# EAGLE board avr_lag2 (EAGLE 5.07)
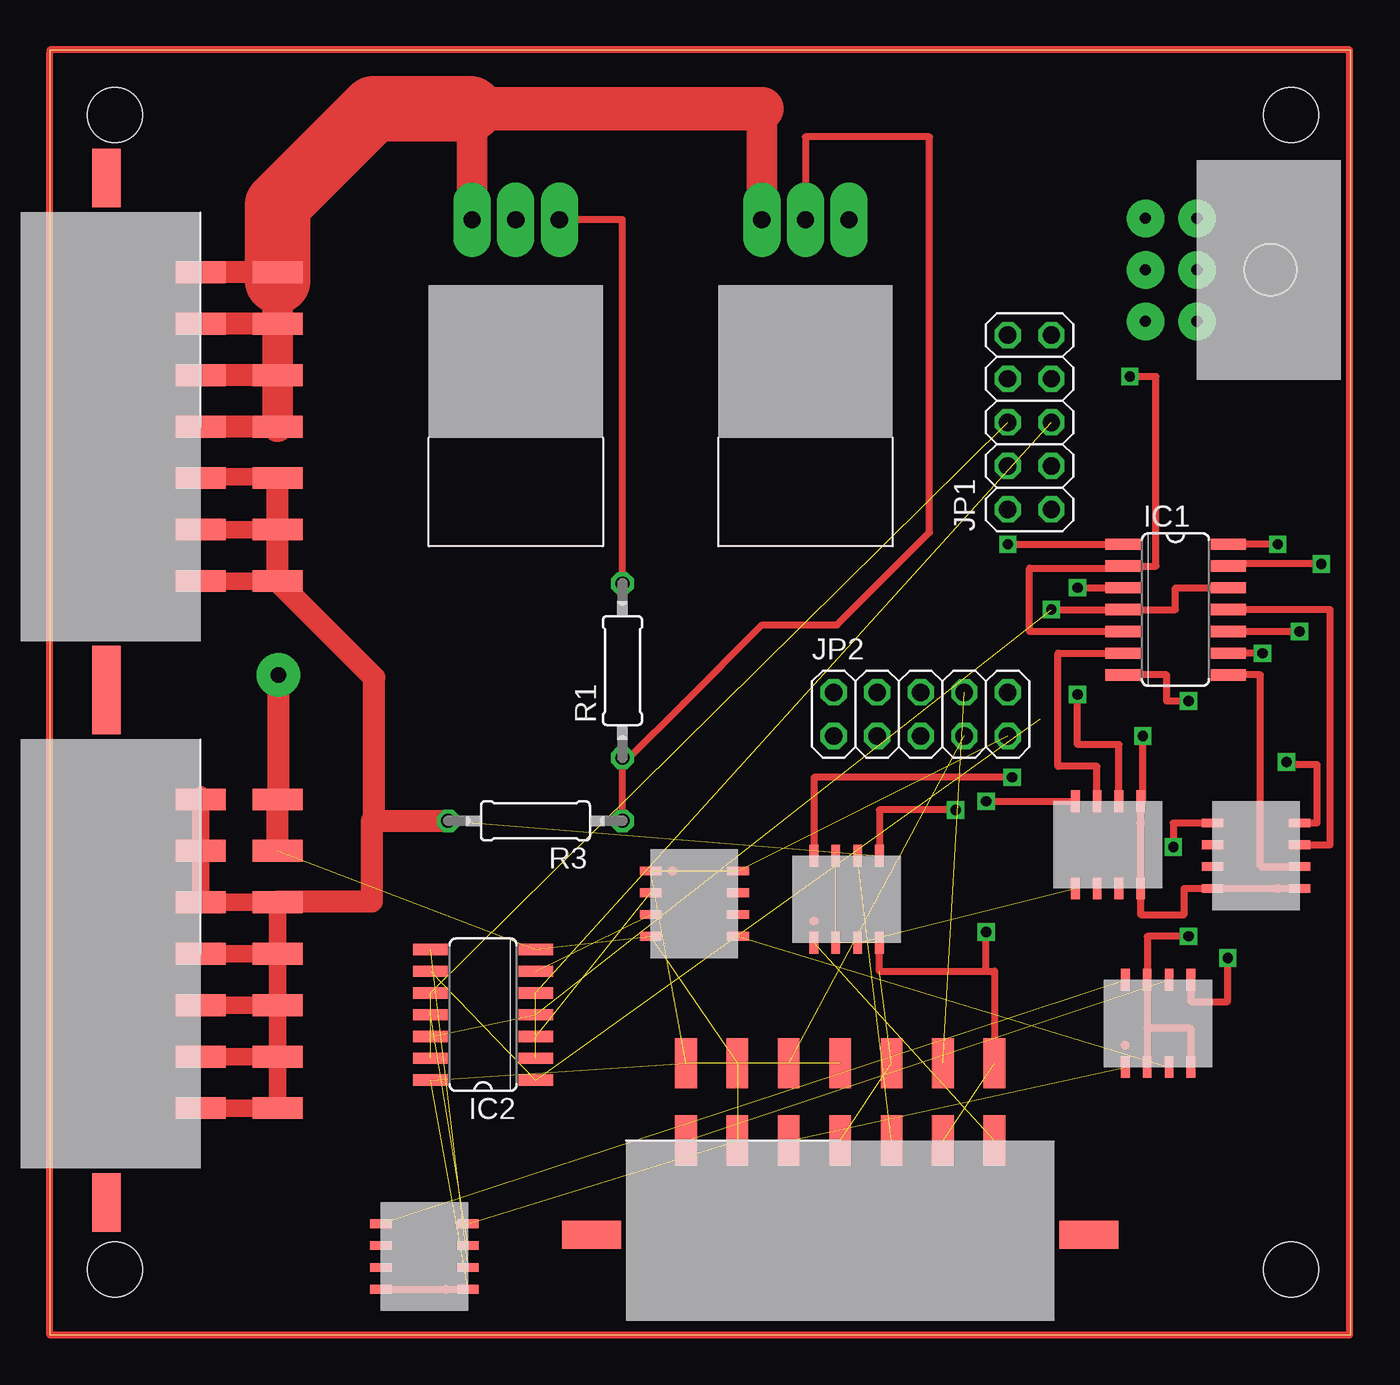
[diagram p0: board, top side]
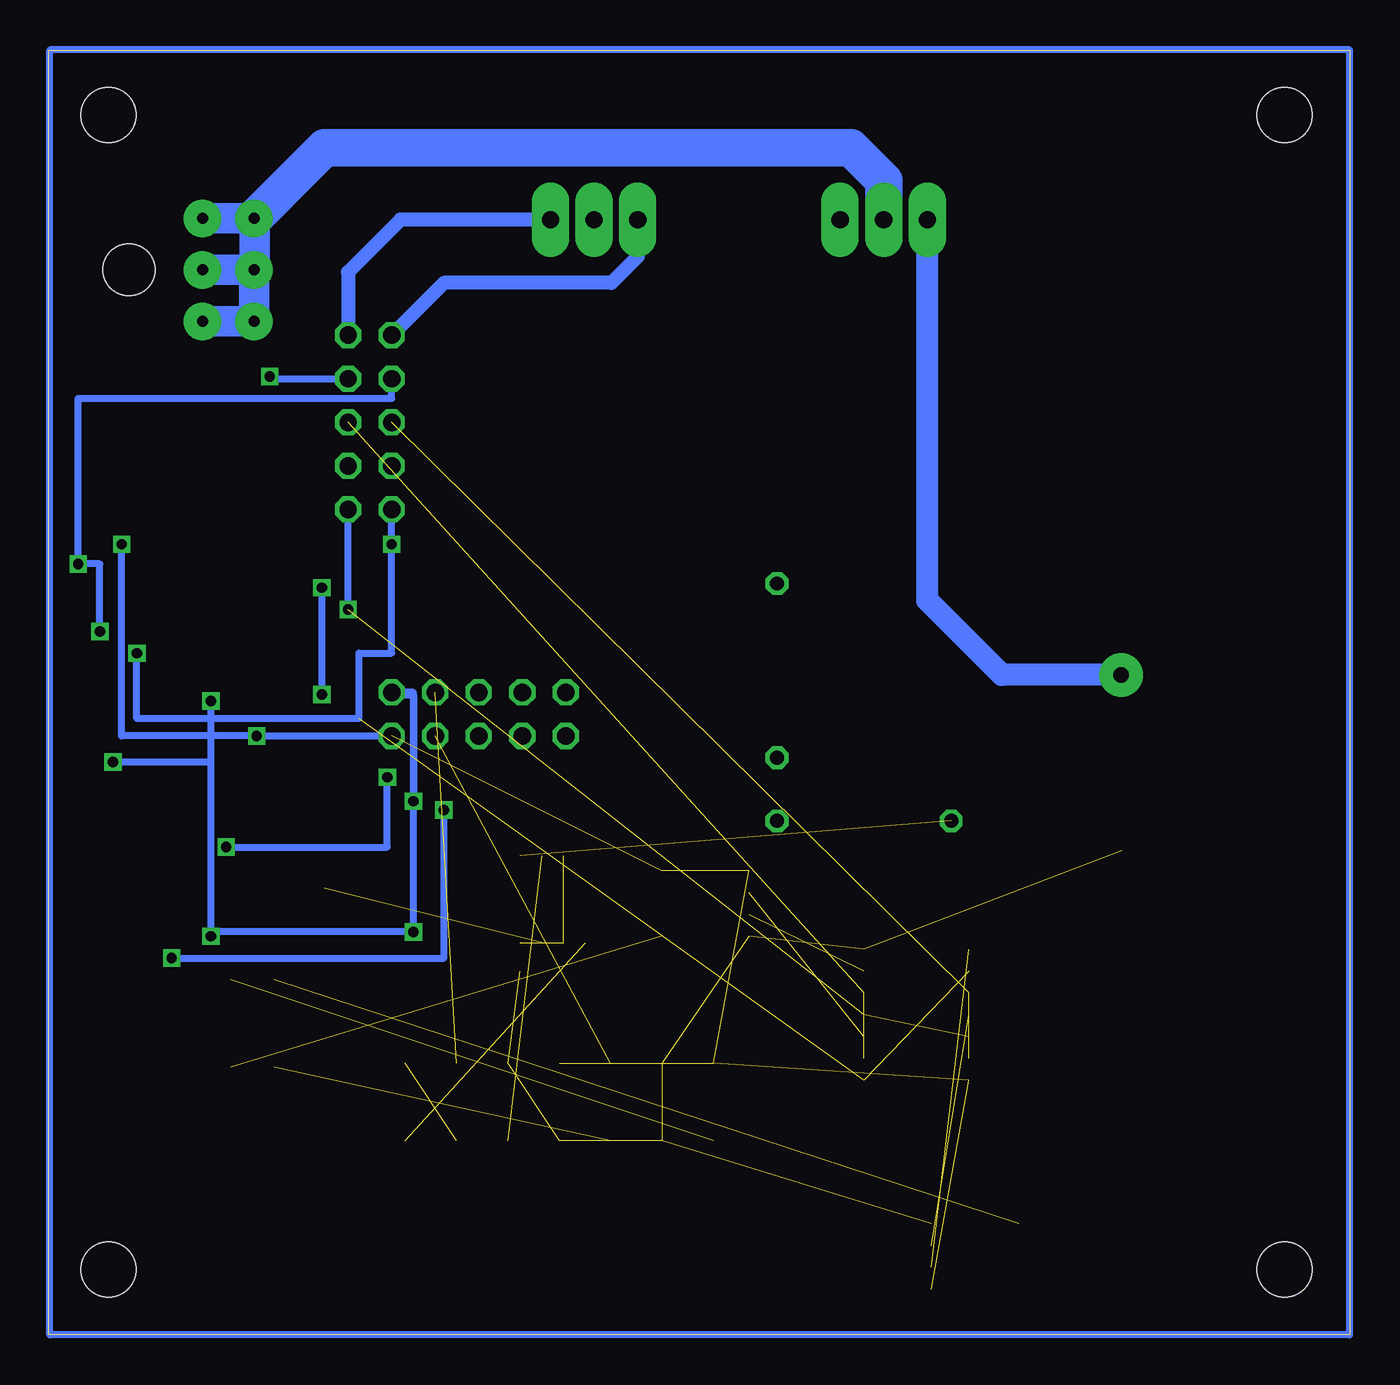
[diagram p1: board, bottom side, seen from below]

Size 75.87 x 74.92 mm. Coordinates in mm from the lower left corner, seen from the top.
Outline: 0,0 75.87,0 75.87,74.92 0,74.92 0,0
Copper layers (1*16): Top 0.035mm / dielectric 1.5mm / Bottom 0.035mm
Design rules "default": minimum track width 10mil, minimum drill 24mil, track to track 8mil, track to pad 8mil, pad to pad 8mil, via to via 8mil, smd to smd 8mil, copper to edge 40mil, drill to drill 8mil, minimum pad ring 10mil, minimum via ring 8mil, stop-mask expansion 4mil, vias tented up to drill 0mil, thermal gap 10mil
Holes 3.2 mm at 3.81,3.81 3.81,71.12 72.39,71.12 72.39,3.81

## Footprints (pad centres in the part's own frame; a part is rotated, then mirrored left to right if it is on the bottom)
SO14 = smd 0.66 x 2.032: 1 -3.81,-3.073; 2 -2.54,-3.073; 3 -1.27,-3.073; 4 0,-3.073; 5 1.27,-3.073; 6 2.54,-3.073; 7 3.81,-3.073; 8 3.81,3.073; 9 2.54,3.073; 10 1.27,3.073; 11 0,3.073; 12 -1.27,3.073; 13 -2.54,3.073; 14 -3.81,3.073
2X05 = drill 1.016 octagon: 1 -5.08,-1.27; 2 -5.08,1.27; 3 -2.54,-1.27; 4 -2.54,1.27; 5 0,-1.27; 6 0,1.27; 7 2.54,-1.27; 8 2.54,1.27; 9 5.08,-1.27; 10 5.08,1.27
0207/10 = drill 0.813 octagon: 1 -5.08,0; 2 5.08,0
IRFZ46N = drill 1 pad 2.184 long: DRAIN_PAD 0,0; GATE_PAD -2.54,0; SOURCE_PAD 2.54,0
MICROFIT14SOCK = smd 3.43 x 1.65: P$15 -14.5,-7.5; P$16 14.5,-7.5 | smd 1.27 x 2.92: PIN1 9,-2; PIN2 6,-2; PIN3 3,-2; PIN4 0,-2; PIN5 -3,-2; PIN6 -6,-2; PIN7 -9,-2; PIN8 9,2.5; PIN9 6,2.5; PIN10 3,2.5; PIN11 0,2.5; PIN12 -3,2.5; PIN13 -6,2.5; PIN14 -9,2.5
MICROFIT6SOCK = drill 0.64 pad 2.184 round: PIN1 3,-1.5; PIN2 3,1.5; PIN3 0,-1.5; PIN4 0,1.5; PIN5 -3,-1.5; PIN6 -3,1.5 | hole 3: 0,-5.8
SOIC8 = smd 0.508 x 1.27: PIN1 -1.27,-2.54; PIN2 0,-2.54; PIN3 1.27,-2.54; PIN4 2.54,-2.54; PIN5 -1.27,2.54; PIN6 0,2.54; PIN7 1.27,2.54; PIN8 2.54,2.54

## Placement (x,y rotation side)
IC1  74HC08D  [SO14]  65.66,42.29 270 top
IC2  74HC08D  [SO14]  25.27,18.67 90 top
JP1  [2X05]  57.15,53.21 90 top
JP2  [2X05]  50.8,36.2 0 top
R1  [0207/10]  33.4,38.73 90 top
R3  [0207/10]  28.32,29.97 180 top
U$1  IRFZ46N  [IRFZ46N]  44.07,65.02 180 top
U$2  IRFZ46N  [IRFZ46N]  27.18,65.02 180 top
U$3  MICROFIT14  [MICROFIT14SOCK]  10.79,52.96 270 top
U$4  MICROFIT14  [MICROFIT14SOCK]  10.79,22.23 270 top
U$5  MICROFIT6  [MICROFIT6SOCK]  65.41,62.1 90 top
U$6  TC1320EOA  [SOIC8]  37.59,25.78 270 top
U$7  TC1320EOA  [SOIC8]  62.36,28.57 180 top
U$8  TC1320EOA  [SOIC8]  70.36,27.3 90 top
U$9  TL072  [SOIC8]  45.85,25.4 0 top
U$10  TC1320EOA  [SOIC8]  21.84,3.94 90 top
U$11  TL072  [SOIC8]  64.01,18.16 0 top
U$12  MICROFIT14  [MICROFIT14SOCK]  46.1,13.34 0 top

## Library data of the parts
IC1 IC2 = 74xx-eu
JP1 JP2 = pinhead
R1 R3 = resistor
U$1-U$12 = unicorn

## Nets
+12V: R3.2 U$3.PIN1 U$3.PIN2 U$3.PIN3 U$3.PIN8 U$3.PIN9 U$3.PIN10 U$4.PIN1 U$4.PIN2 U$4.PIN3 U$4.PIN4 U$4.PIN5 U$4.PIN6 U$4.PIN7 U$4.PIN8 U$4.PIN9 U$4.PIN10 U$4.PIN11 U$4.PIN12 U$9.PIN8 U$11.PIN8
ADC0_PF0: JP2.1
ADC1_PF1: JP2.2
ADC2_PF2: JP2.3
ADC3_PF3: JP2.4
ADC4_PF4: JP2.5
ADC5_PF5: JP2.6
ADC6_PF6: JP2.7 U$12.PIN12
ADC7_PF7: JP2.8 U$12.PIN9
GND: IC1.7 IC2.7 JP1.10 JP2.10 U$1.SOURCE_PAD U$2.SOURCE_PAD U$3.PIN4 U$3.PIN5 U$3.PIN6 U$3.PIN7 U$3.PIN11 U$3.PIN12 U$3.PIN13 U$3.PIN14 U$4.PIN13 U$4.PIN14 U$6.PIN4 U$7.PIN4 U$8.PIN4 U$9.PIN2 U$9.PIN4 U$9.PIN6 U$10.PIN4 U$11.PIN2 U$11.PIN4 U$11.PIN6 U$12.PIN2 U$12.PIN4 U$12.PIN6 U$12.PIN8 U$12.PIN10 U$12.PIN13
MOTOR_GND: U$2.DRAIN_PAD U$5.PIN1 U$5.PIN2 U$5.PIN3 U$5.PIN4 U$5.PIN5 U$5.PIN6
N$1: R1.1 R3.1 U$1.DRAIN_PAD
N$2: R1.2 U$2.GATE_PAD
N$5: U$7.PIN8 U$9.PIN3
N$6: U$8.PIN8 U$9.PIN5
N$9: IC1.11 U$8.PIN3
N$12: IC1.8 U$8.PIN2
N$13: IC1.6 U$7.PIN3
N$14: IC1.3 U$7.PIN2
N$15: U$6.PIN8 U$11.PIN3
N$16: U$10.PIN8 U$11.PIN5
N$17: IC2.11 U$10.PIN3
N$18: IC2.8 U$10.PIN2
N$19: IC2.6 U$6.PIN3
N$20: IC2.3 U$6.PIN2
PB2_MOSI: JP1.4
PB3: IC2.2 IC2.5 JP1.5
PB4: IC2.10 IC2.13 JP1.6
PB5: IC1.2 IC1.5 JP1.7
PB6: IC1.10 IC1.13 JP1.8
PWM: JP1.9 U$1.GATE_PAD
SCK: JP1.3
SCL: IC1.4 IC1.12 IC2.4 IC2.12 JP1.1
SDA: IC1.1 IC1.9 IC2.1 IC2.9 JP1.2
VCC: IC1.14 IC2.14 JP2.9 U$6.PIN1 U$6.PIN5 U$7.PIN1 U$7.PIN5 U$8.PIN1 U$8.PIN5 U$10.PIN1 U$10.PIN5 U$12.PIN11 U$12.PIN14
VOUT_CLUTCH1: U$11.PIN1 U$12.PIN5
VOUT_CLUTCH2: U$11.PIN7 U$12.PIN7
VOUT_GEAR1: U$9.PIN1 U$12.PIN1
VOUT_GEAR2: U$9.PIN7 U$12.PIN3

## Tracks (layer width: path | path; a pad name or v marks a point on that pad's centre or on a via)
+12V  (via drill 0.6)  (1 unrouted)
  Top 0.406: U$3.PIN3 8.76,49.96 8.76,50.04 | U$3.PIN10 13.29,50.04 | U$4.PIN10 13.46,19.23 13.46,18.67 13.29,18.67 | U$4.PIN1 9.02,13.22 9.02,13.21 | 13.29,13.21 U$4.PIN8 | U$4.PIN7 8.76,31.23 8.76,31.5 8.79,31.5 | 18.8,29.97 18.92,29.97 | U$4.PIN12 13.29,25.27 | U$11.PIN8 66.55,19.43 68.71,19.43 v68.71,21.97 | v52.83,30.61 48.39,30.61 U$9.PIN8 | U$4.PIN11 13.72,22.23 13.72,21.97 U$4.PIN11
  Top 1.016: U$3.PIN9 U$3.PIN2 | 13.29,50.04 8.76,50.04 | U$3.PIN8 U$3.PIN1 | U$4.PIN11 U$4.PIN4 | U$4.PIN3 U$4.PIN10 U$4.PIN11 | U$4.PIN9 U$4.PIN2 | 9.02,13.21 13.29,13.21 | 8.79,31.5 U$4.PIN6 U$4.PIN5 U$4.PIN12 U$4.PIN11 | U$4.PIN9 13.29,18.67 | U$4.PIN8 U$4.PIN9
  Top 1.27: R3.2 18.92,29.97 18.92,38.33 U$3.PIN8 U$3.PIN9 U$3.PIN10 | 18.8,29.97 18.8,25.27 13.29,25.27
  Bottom 0.406: v68.71,21.97 52.83,21.97 v52.83,30.61
ADC6_PF6  (1 unrouted)
ADC7_PF7  (1 unrouted)
GND  (via drill 0.6, 0.9 pad 2.54)  (11 unrouted)
  Top 0.406: U$3.PIN4 9.14,52.96 | 24.64,71.5 24.51,71.5 | U$4.PIN14 13.34,31.23 | v54.61,31.11 U$7.PIN4 | U$8.PIN4 73.91,29.84 73.91,33.27 72.14,33.27 v72.14,33.4 | v66.42,23.24 64.01,23.24 U$11.PIN6 64.01,17.91 | 64.01,17.91 U$11.PIN2 | U$11.PIN4 66.55,17.91 64.01,17.91 | v66.42,36.96 65.15,36.96 65.15,38.48 IC1.7 | 54.61,21.21 v54.61,23.5 | 54.61,21.21 48.39,21.21 U$9.PIN4 | 54.61,21.21 55.1,21.21 U$12.PIN8
  Top 1.27: U$3.PIN14 U$3.PIN7 | U$3.PIN13 U$3.PIN6 | U$3.PIN12 U$3.PIN5 | U$3.PIN11 U$3.PIN4 | U$4.PIN13 U$4.PIN14 | 13.34,31.23 v13.34,38.48
  Top 1.778: U$3.PIN14 13.29,61.47 U$3.PIN13 U$3.PIN12 U$3.PIN11 | U$2.SOURCE_PAD 24.64,71.5 | 41.53,71.5 U$1.SOURCE_PAD
  Top 2.54: 24.64,71.5 41.53,71.5
  Top 3.81: 24.51,71.5 18.89,71.5 13.29,65.9 13.29,61.47
  Bottom 0.406: 24.64,42.83 24.64,42.67 | v54.61,31.11 54.61,37.34 55.88,37.34 JP2.10 54.61,37.47 v54.61,23.5 66.42,23.5 v66.42,23.24 66.42,33.4 | 66.42,33.4 v72.14,33.4 | 66.42,33.4 v66.42,36.96
  Bottom 0.813: U$1.SOURCE_PAD 41.53,62.87 43.06,61.34 52.83,61.34 JP1.10
  Bottom 1.27: v13.34,38.48 20.29,38.48 24.64,42.83 U$2.SOURCE_PAD
MOTOR_GND
  Bottom 0.406: U$5.PIN4 63.91,62.36 63.88,62.36 | U$5.PIN2 63.88,65.1
  Bottom 1.778: U$5.PIN5 U$5.PIN6 U$5.PIN4 U$5.PIN3 | 63.88,65.1 63.88,62.36 | U$5.PIN2 U$5.PIN1
  Bottom 2.184: U$2.DRAIN_PAD 27.18,67.31 29.08,69.22 59.79,69.22 U$5.PIN2
N$1
  Top 0.406: U$1.DRAIN_PAD 44.07,69.85 51.31,69.85 51.31,46.79 45.92,41.4 41.55,41.4 36.96,36.81 33.8,33.66 R1.1 R3.1
N$2
  Top 0.406: 29.84,64.9 29.84,65.02 U$2.GATE_PAD 33.4,65.02 33.4,43.94 33.53,43.94 33.53,43.81 R1.2
N$5  (1 unrouted)
N$6  (via drill 0.6)
  Top 0.406: U$8.PIN8 65.53,29.84 v65.53,28.45 | v56.13,32.51 44.58,32.51 U$9.PIN5
  Bottom 0.406: v65.53,28.45 56.13,28.45 v56.13,32.51
N$9
  Top 0.406: U$8.PIN3 74.68,28.57 74.68,42.29 IC1.11
N$10
  Bottom 0.406: 0,74.93 75.82,74.93 75.82,0 0,0 0,74.93
N$11
  Top 0.406: 0,74.93 75.82,74.93 75.82,0 0,0 0,74.8
N$12
  Top 0.406: U$8.PIN2 70.61,27.3 70.61,38.48 IC1.8
N$13
  Top 0.406: IC1.6 58.8,39.75 58.8,33.15 61.09,33.15 U$7.PIN3
N$14  (via drill 0.6)
  Top 0.406: v59.94,43.56 IC1.3 | v59.94,37.34 59.94,34.42 62.36,34.42 U$7.PIN2
  Bottom 0.406: v59.94,37.34 v59.94,43.56
N$15  (1 unrouted)
N$16  (1 unrouted)
N$17  (1 unrouted)
N$18  (1 unrouted)
N$19  (1 unrouted)
N$20  (1 unrouted)
PB3  (2 unrouted)
PB4  (2 unrouted)
PB5  (via drill 0.6)
  Top 0.406: v62.99,55.88 64.52,55.88 64.52,44.83 IC1.2 62.61,44.83 62.61,44.7 57.15,44.7 57.15,41.02 IC1.5
  Bottom 0.406: JP1.7 62.99,55.75 v62.99,55.88
PB6  (via drill 0.6)
  Top 0.406: v74.17,44.96 68.73,44.96 IC1.13 | IC1.10 v72.9,41.02
  Bottom 0.406: JP1.8 55.88,54.61 74.17,54.61 v74.17,44.96 72.9,44.96 v72.9,41.02
PWM
  Bottom 0.813: U$1.GATE_PAD 55.37,65.02 58.42,61.97 JP1.9
SCL  (via drill 0.6)  (2 unrouted)
  Top 0.406: IC1.12 65.66,43.56 65.66,42.29 IC1.4 v58.42,42.29
  Bottom 0.406: v58.42,42.29 JP1.1
SDA  (via drill 0.6)  (2 unrouted)
  Top 0.406: v55.88,46.1 IC1.1 | v70.74,39.75 IC1.9
  Bottom 0.406: JP1.2 v55.88,46.1 55.88,39.75 57.78,39.75 57.78,35.94 70.74,35.94 v70.74,39.75
VCC  (via drill 0.6)  (6 unrouted)
  Top 0.406: U$10.PIN5 U$10.PIN1 | v71.63,46.1 IC1.14 | v63.75,34.92 63.75,31.11 U$7.PIN1 U$7.PIN5 63.63,24.51 66.17,24.51 66.17,26.04 U$8.PIN5 U$8.PIN1
  Bottom 0.406: v71.63,46.1 71.63,34.92 v63.75,34.92 JP2.9
VOUT_CLUTCH1  (1 unrouted)
VOUT_CLUTCH2  (1 unrouted)
VOUT_GEAR1  (1 unrouted)
VOUT_GEAR2  (1 unrouted)
(copper drawn outside any net)
  shapes: Bottom circle x4, Top circle x4

## Text on the board
Top: UNICORN NODE4